# EAGLE board mainboard (EAGLE 6.3)
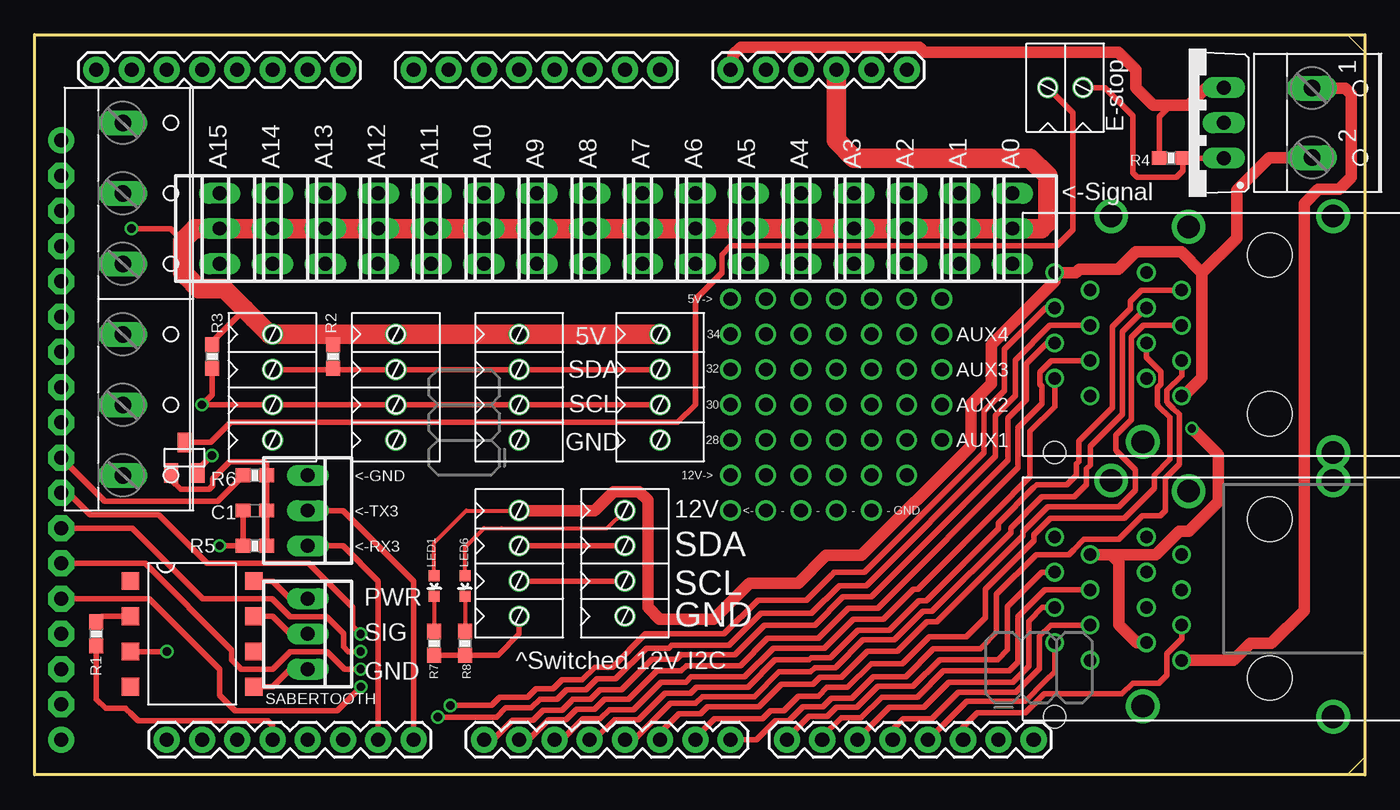
[diagram p0: board, top side]
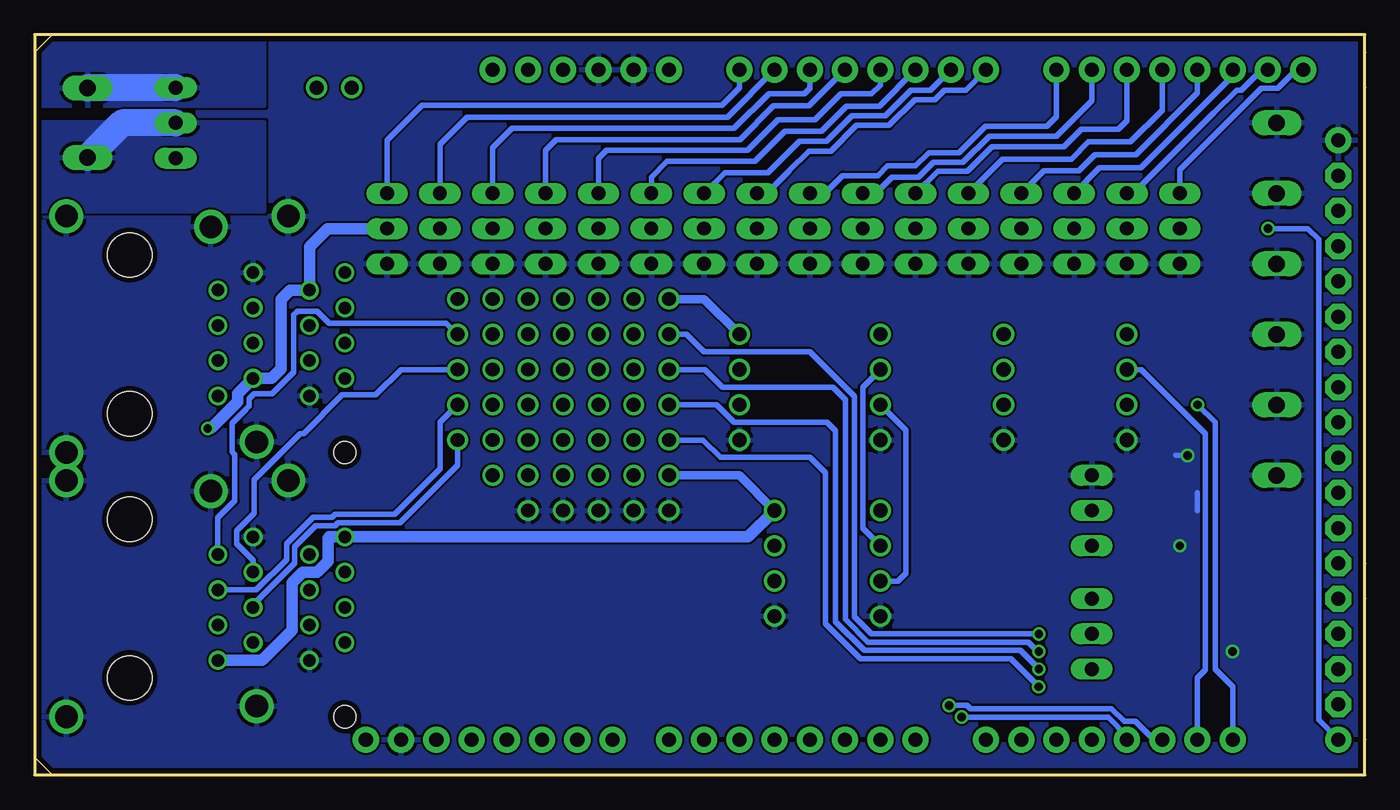
[diagram p1: board, bottom side, seen from below]

Size 95.89 x 53.34 mm. Coordinates in mm from the lower left corner, seen from the top.
Outline: 0,15.88 0,12.7 0,1.27 0,0 94.62,0 95.89,1.27 95.89,52.07 94.62,53.34 0,53.34 0,52.07 0,50.8 0,48.9 0,15.88
Copper layers (1*16): Top 0.0356mm / dielectric 1.5011mm / Bottom 0.0356mm
Design rules "LaenPCBOrder *": minimum track width 6mil, minimum drill 13mil, track to track 6mil, track to pad 6mil, pad to pad 6mil, via to via 6mil, smd to smd 6mil, copper to edge 15mil, drill to drill 6mil, minimum pad ring 7mil, minimum via ring 7mil, stop-mask expansion 4mil, vias tented up to drill 24mil, thermal gap 10mil

## Footprints (pad centres in the part's own frame; a part is rotated, then mirrored left to right if it is on the bottom)
SCREW_TERMINAL_4 = drill 1.016 pad 1.422: P$1 0,3.81; P$2 0,1.27; P$3 0,-1.27; P$4 0,-3.81
C0603 = smd 1.1 x 1: 1 -0.85,0; 2 0.85,0
LED-0603 = smd 0.8 x 0.8: A 0,-0.75; C 0,0.75
TO220BV = drill 1.016 long: D 0,-2.54; G -2.54,-2.54; S 2.54,-2.54
SOT23 = smd 1 x 1.4: 1 -0.95,-1.1; 2 0.95,-1.1; 3 0,1.1
0603-RES = smd 1.1 x 1: 1 -0.85,0; 2 0.85,0
22-23-2031 = drill 1 long: 1 -2.54,0; 2 0,0; 3 2.54,0
ARDUINO_MEGA_ISAAC = drill 1.016 pad 1.88: 0 63.5,50.8; 1 60.96,50.8; 2 58.42,50.8; 3 55.88,50.8; 3.3V 35.56,2.54; 4 53.34,50.8; 5 50.8,50.8; 5V@0 38.1,2.54; 5V@1 93.98,50.8; 6 48.26,50.8; 7 45.72,50.8; 8 41.656,50.8; 9 39.116,50.8; 10 36.576,50.8; 11 34.036,50.8; 12 31.496,50.8; 13 28.956,50.8; 14 68.58,50.8; 15 71.12,50.8; 16 73.66,50.8; 17 76.2,50.8; 18 78.74,50.8; 19 81.28,50.8; 20 83.82,50.8; 21 86.36,50.8; A0 50.8,2.54; A1 53.34,2.54; A2 55.88,2.54; A3 58.42,2.54; A4 60.96,2.54; A5 63.5,2.54; A6 66.04,2.54; A7 68.58,2.54; A8 73.66,2.54; A9 76.2,2.54; A10 78.74,2.54; A11 81.28,2.54; A12 83.82,2.54; A13 86.36,2.54; A14 88.9,2.54; A15 91.44,2.54; AREF 23.876,50.8; GND@0 40.64,2.54; GND@1 43.18,2.54; GND@2 93.98,7.62; GND@4 26.416,50.8; RESET 33.02,2.54; VIN 45.72,2.54 | drill 1.016 pad 1.88 octagon: 22 93.98,48.26; 24 93.98,45.72; 26 93.98,43.18; 28 93.98,40.64; 30 93.98,38.1; 32 93.98,35.56; 34 93.98,33.02; 36 93.98,30.48; 38 93.98,27.94; 40 93.98,25.4; 42 93.98,22.86; 44 93.98,20.32; 46 93.98,17.78; 48 93.98,15.24; 50 93.98,12.7; 52 93.98,10.16
SCREW_TERMINAL_2 = drill 1.016 pad 1.422: P$1 0,1.27; P$2 0,-1.27
RJ45-DUAL-10118096 = drill 0.9: 9 4.445,-2.032; 10 3.175,-4.572; 11 1.905,-2.032; 12 0.635,-4.572; 13 -0.635,-2.032; 14 -1.905,-4.572; 15 -3.175,-2.032; 16 -4.445,-4.572; P$1 4.445,4.572; P$2 3.175,2.032; P$3 1.905,4.572; P$4 0.635,2.032; P$5 -0.635,4.572; P$6 -1.905,2.032; P$7 -3.175,4.572; P$8 -4.445,2.032 | drill 1.625: SHIELD1 8.509,0.508; SHIELD2 7.747,-5.08; SHIELD3 8.509,-15.494; SHIELD4 -8.509,-15.494; SHIELD5 -7.747,-1.778 | hole 3.2: -5.715,-10.922; 5.715,-10.922 | hole 1.6: -8.509,4.572
8-SMD-GULLWING = smd 1.27 x 1.27: P$1 3.81,4.445; P$2 1.27,4.445; P$3 -1.27,4.445; P$4 -3.81,4.445; P$5 -3.81,-4.445; P$6 -1.27,-4.445; P$7 1.27,-4.445; P$8 3.81,-4.445
PLATED_HOLE = drill 1: P$1 0,0
W237-102 = drill 1.194 long: 1 -2.5,-1.27; 2 2.5,-1.27
W237-6P = drill 1.194 long: 1 -12.7,-0.635; 2 -7.62,-0.635; 3 -2.54,-0.635; 4 2.54,-0.635; 5 7.62,-0.635; 6 12.7,-0.635

## Placement (x,y rotation side)
5V_I2C1  SCREW_TERMINAL_4  [SCREW_TERMINAL_4]  17.15,27.94 0 top
5V_I2C2  SCREW_TERMINAL_4  [SCREW_TERMINAL_4]  26.04,27.94 0 top
5V_I2C3  SCREW_TERMINAL_4  [SCREW_TERMINAL_4]  34.93,27.94 0 top
5V_I2C4  SCREW_TERMINAL_4  [SCREW_TERMINAL_4]  45.09,27.94 0 top
12V_I2C  SCREW_TERMINAL_4  [SCREW_TERMINAL_4]  42.55,15.24 0 top
C1  4.7uF  [C0603]  15.88,19.05 180 top
I2C_LEDS  SCREW_TERMINAL_4  [SCREW_TERMINAL_4]  34.93,15.24 0 top
LED1  [LED-0603]  28.8,13.61 180 top
LED6  [LED-0603]  31.01,13.61 180 top
Q1  IRF9530  [TO220BV]  83.19,46.99 90 top
Q2  NFET  [SOT23]  10.8,22.86 0 top
R1  2k  [0603-RES]  4.45,10.16 90 top
R2  2k  [0603-RES]  21.51,30.15 90 top
R3  2k  [0603-RES]  12.8,30.15 90 top
R4  2k  [0603-RES]  81.92,44.45 180 top
R5  100k  [0603-RES]  15.88,16.51 0 top
R6  10k  [0603-RES]  15.88,21.59 180 top
R7  2k  [0603-RES]  28.8,9.47 270 top
R8  2k  [0603-RES]  31.01,9.47 270 top
SERIAL_3  22-23-2031  [22-23-2031]  19.69,19.05 270 top
U1  ARDUINO-MEGA-ISAACFULL  [ARDUINO_MEGA_ISAAC]  95.89,53.34 180 top
U$1  E-stop  [SCREW_TERMINAL_2]  74.3,49.53 90 top
U$2  RJ45-DUAL-STACKED  [RJ45-DUAL-10118096]  78.11,12.7 90 top
U$3  SFH6701-SMD8  [8-SMD-GULLWING]  11.35,10.16 90 top
U$4  RJ45-DUAL-STACKED  [RJ45-DUAL-10118096]  78.11,31.75 90 top
U$5  SINGLE_TERMINAL  [PLATED_HOLE]  50.17,24.13 0 top
U$6  SINGLE_TERMINAL  [PLATED_HOLE]  50.17,26.67 0 top
U$7  SINGLE_TERMINAL  [PLATED_HOLE]  50.17,29.21 0 top
U$8  SINGLE_TERMINAL  [PLATED_HOLE]  50.17,31.75 0 top
U$9  SINGLE_TERMINAL  [PLATED_HOLE]  65.41,24.13 0 top
U$10  SINGLE_TERMINAL  [PLATED_HOLE]  65.41,26.67 0 top
U$11  SINGLE_TERMINAL  [PLATED_HOLE]  65.41,29.21 0 top
U$12  SINGLE_TERMINAL  [PLATED_HOLE]  65.41,31.75 0 top
U$13  SINGLE_TERMINAL  [PLATED_HOLE]  52.71,31.75 0 top
U$14  SINGLE_TERMINAL  [PLATED_HOLE]  52.71,29.21 0 top
U$15  SINGLE_TERMINAL  [PLATED_HOLE]  52.71,26.67 0 top
U$16  SINGLE_TERMINAL  [PLATED_HOLE]  52.71,24.13 0 top
U$17  SINGLE_TERMINAL  [PLATED_HOLE]  55.25,31.75 0 top
U$18  SINGLE_TERMINAL  [PLATED_HOLE]  55.25,29.21 0 top
U$19  SINGLE_TERMINAL  [PLATED_HOLE]  55.25,26.67 0 top
U$20  SINGLE_TERMINAL  [PLATED_HOLE]  57.79,31.75 0 top
U$21  SINGLE_TERMINAL  [PLATED_HOLE]  55.25,24.13 0 top
U$22  SINGLE_TERMINAL  [PLATED_HOLE]  57.79,29.21 0 top
U$23  SINGLE_TERMINAL  [PLATED_HOLE]  57.79,26.67 0 top
U$24  SINGLE_TERMINAL  [PLATED_HOLE]  57.79,24.13 0 top
U$25  SINGLE_TERMINAL  [PLATED_HOLE]  60.33,31.75 0 top
U$26  SINGLE_TERMINAL  [PLATED_HOLE]  62.87,31.75 0 top
U$27  SINGLE_TERMINAL  [PLATED_HOLE]  60.33,29.21 0 top
U$28  SINGLE_TERMINAL  [PLATED_HOLE]  62.87,29.21 0 top
U$29  SINGLE_TERMINAL  [PLATED_HOLE]  60.33,26.67 0 top
U$30  SINGLE_TERMINAL  [PLATED_HOLE]  60.33,24.13 0 top
U$31  SINGLE_TERMINAL  [PLATED_HOLE]  62.87,26.67 0 top
U$32  SINGLE_TERMINAL  [PLATED_HOLE]  62.87,24.13 0 top
U$33  SINGLE_TERMINAL  [PLATED_HOLE]  52.71,21.59 0 top
U$34  SINGLE_TERMINAL  [PLATED_HOLE]  50.17,21.59 0 top
U$35  SINGLE_TERMINAL  [PLATED_HOLE]  57.79,21.59 0 top
U$36  SINGLE_TERMINAL  [PLATED_HOLE]  55.25,21.59 0 top
U$37  SINGLE_TERMINAL  [PLATED_HOLE]  60.33,21.59 0 top
U$38  SINGLE_TERMINAL  [PLATED_HOLE]  50.17,34.29 0 top
U$39  SINGLE_TERMINAL  [PLATED_HOLE]  52.71,34.29 0 top
U$40  SINGLE_TERMINAL  [PLATED_HOLE]  57.79,34.29 0 top
U$41  SINGLE_TERMINAL  [PLATED_HOLE]  55.25,34.29 0 top
U$42  SINGLE_TERMINAL  [PLATED_HOLE]  60.33,34.29 0 top
U$43  SINGLE_TERMINAL  [PLATED_HOLE]  62.87,34.29 0 top
U$44  SINGLE_TERMINAL  [PLATED_HOLE]  65.41,34.29 0 top
U$45  SINGLE_TERMINAL  [PLATED_HOLE]  50.17,19.05 0 top
U$46  SINGLE_TERMINAL  [PLATED_HOLE]  62.87,21.59 0 top
U$47  SINGLE_TERMINAL  [PLATED_HOLE]  52.71,19.05 0 top
U$48  SINGLE_TERMINAL  [PLATED_HOLE]  55.25,19.05 0 top
U$49  SINGLE_TERMINAL  [PLATED_HOLE]  57.79,19.05 0 top
U$50  SINGLE_TERMINAL  [PLATED_HOLE]  60.33,19.05 0 top
X1  22-23-2031  [22-23-2031]  70.49,39.37 90 top
X2  22-23-2031  [22-23-2031]  66.68,39.37 90 top
X3  22-23-2031  [22-23-2031]  62.87,39.37 90 top
X4  22-23-2031  [22-23-2031]  59.06,39.37 90 top
X5  22-23-2031  [22-23-2031]  55.25,39.37 90 top
X6  22-23-2031  [22-23-2031]  51.44,39.37 90 top
X7  22-23-2031  [22-23-2031]  47.63,39.37 90 top
X8  22-23-2031  [22-23-2031]  43.82,39.37 90 top
X9  22-23-2031  [22-23-2031]  40.01,39.37 90 top
X10  22-23-2031  [22-23-2031]  36.2,39.37 90 top
X11  22-23-2031  [22-23-2031]  32.39,39.37 90 top
X12  22-23-2031  [22-23-2031]  28.58,39.37 90 top
X13  22-23-2031  [22-23-2031]  24.77,39.37 90 top
X14  22-23-2031  [22-23-2031]  20.96,39.37 90 top
X15  22-23-2031  [22-23-2031]  17.15,39.37 90 top
X16  22-23-2031  [22-23-2031]  13.34,39.37 90 top
X17  22-23-2031  [22-23-2031]  19.69,10.16 270 top
X18  [W237-102]  93.35,46.99 270 top
X19  [W237-6P]  6.99,34.29 270 top

## Library data of the parts
5V_I2C1-5V_I2C4 12V_I2C I2C_LEDS U$1-U$50 = isaac1
C1 = rcl
LED1 LED6 = SparkFun-LED
Q1 = Adams Chips
Q2 = SparkFun-DiscreteSemi; PROD_ID: TRANS-08345
R1-R8 = SparkFun-Resistors
SERIAL_3 X1-X17 = con-molex; MF: MOLEX; MPN: 22-23-2031; OC_FARNELL: 1462950; OC_NEWARK: 30C0862
U1 = SparkFun-Boards - Isaac_Copy
X18 = con-wago-500; MPN: 237-102; OC_FARNELL: unknown; OC_NEWARK: 70K9898
X19 = con-wago-508; OC_FARNELL: unknown; OC_NEWARK: unknown

## Nets
2: U1.2 U$4.P$7
3: U1.3 U$4.10
4: U1.4 U$4.11
5: U1.5 U$4.12
6: U1.6 U$4.13
7: U1.7 U$4.14
8: U1.8 U$2.P$3
9: U1.9 U$2.P$4
10: U1.10 U$2.P$5
11: U1.11 U$2.P$6
12: U1.12 U$2.P$7
13: U1.13 U$2.14
28: U1.28 U$5.P$1
30: U1.30 U$6.P$1
32: U1.32 U$7.P$1
34: U1.34 U$8.P$1
+5V: 5V_I2C1.P$1 5V_I2C2.P$1 5V_I2C3.P$1 5V_I2C4.P$1 R2.2 R3.2 U1.5V@0 U1.5V@1 U$2.15 U$2.P$2 U$4.15 U$4.P$2 U$38.P$1 X1.2 X2.2 X3.2 X4.2 X5.2 X6.2 X7.2 X8.2 X9.2 X10.2 X11.2 X12.2 X13.2 X14.2 X15.2 X16.2
+12: 12V_I2C.P$1 LED6.A Q1.S R4.2 U1.VIN U$2.16 U$2.P$1 U$34.P$1 X18.1
A0: U1.A0 X1.3
A1: U1.A1 X2.3
A2: U1.A2 X3.3
A3: U1.A3 X4.3
A4: U1.A4 X5.3
A5: U1.A5 X6.3
A6: U1.A6 X7.3
A7: U1.A7 X8.3
A8: U1.A8 X9.3
A9: U1.A9 X10.3
A10: U1.A10 X11.3
A11: U1.A11 X12.3
A12: U1.A12 X13.3
A13: U1.A13 X14.3
A14: U1.A14 X15.3
A15: U1.A15 X16.3
AUX1: U$2.13 U$9.P$1
AUX2: U$2.12 U$10.P$1
AUX3: U$2.11 U$11.P$1
AUX4: U$2.10 U$12.P$1
GND: 5V_I2C1.P$4 5V_I2C2.P$4 5V_I2C3.P$4 5V_I2C4.P$4 12V_I2C.P$4 C1.2 I2C_LEDS.P$4 Q2.2 R5.1 R7.2 R8.2 SERIAL_3.1 U1.GND@0 U1.GND@1 U1.GND@2 U1.GND@4 U$2.9 U$2.P$8 U$2.SHIELD1 U$2.SHIELD2 U$2.SHIELD3 U$2.SHIELD4 U$2.SHIELD5 U$3.P$3 U$4.9 U$4.P$8 U$4.SHIELD1 U$4.SHIELD2 U$4.SHIELD3 U$4.SHIELD4 U$4.SHIELD5 U$45.P$1 U$47.P$1 U$48.P$1 U$49.P$1 U$50.P$1 X1.1 X2.1 X3.1 X4.1 X5.1 X6.1 X7.1 X8.1 X9.1 X10.1 X11.1 X12.1 X13.1 X14.1 X15.1 X16.1 X19.1 X19.2 X19.3 X19.4 X19.5 X19.6
N: Q1.G R4.1 U$1.P$2
N1: C1.1 Q2.1 R5.2 R6.1
N$1: U$3.P$8 X17.1
N$2: R1.2 U$3.P$2
N$3: U$3.P$7 X17.2
N$4: U$3.P$5 X17.3
N$5: SERIAL_3.3 U1.15
N$6: SERIAL_3.2 U1.14
N$7: Q2.3 U$1.P$1
N$8: LED1.C R7.1
N$9: LED6.C R8.1
PERIPHERAL_POWER: R6.2 U1.36
PERIPHERALS: I2C_LEDS.P$1 LED1.A Q1.D U$4.16 U$4.P$1 X18.2
RX0: U1.0 U$4.P$5
RX1: U1.19 U$4.P$3
RX2: U1.17
SCL: 5V_I2C1.P$3 5V_I2C2.P$3 5V_I2C3.P$3 5V_I2C4.P$3 12V_I2C.P$3 I2C_LEDS.P$3 R3.1 U1.21
SDA: 5V_I2C1.P$2 5V_I2C2.P$2 5V_I2C3.P$2 5V_I2C4.P$2 12V_I2C.P$2 I2C_LEDS.P$2 R2.1 U1.20
TX0: U1.1 U$4.P$6
TX1: R1.1 U1.18 U$4.P$4
TX2: U1.16

## Tracks (layer width: path | path; a pad name or v marks a point on that pad's centre or on a via)
2
  Top 0.406: U1.2 38.02,2.54 39.52,4.04 40.77,4.04 41.43,4.7 43.16,4.7 45.14,6.68 46.94,6.68 47.32,7.06 51.18,7.06 53.26,9.14 56.95,9.14 59.03,11.23 61.19,11.23 63.35,13.39 63.68,13.39 69.27,18.97 71.76,21.49 71.76,24.77 73.53,26.52 U$4.P$7
3
  Top 0.406: U1.3 40.34,2.54 41.78,3.99 43.54,3.99 45.44,5.89 47.27,5.89 47.7,6.33 51.41,6.33 53.37,8.28 55.83,8.28 56.01,8.46 57.38,8.46 59.36,10.44 61.62,10.44 63.73,12.55 64.29,12.55 69.47,17.73 69.47,18.14 72.01,20.68 72.24,20.9 74.07,20.9 74.42,20.9 75.11,21.59 75.11,22.28 75.11,22.43 75.26,22.58 75.26,24.03 76.96,25.73 77.7,26.47 77.7,32.31 78.99,33.6 78.99,34.14 79.78,34.92 U$4.10
4
  Top 0.406: U1.4 43.21,2.54 45.82,5.16 47.65,5.16 48.13,5.64 51.89,5.64 53.67,7.42 55.93,7.42 56.24,7.72 57.71,7.72 59.72,9.73 61.98,9.73 64.03,11.79 64.69,11.79 70.36,17.45 70.36,17.78 72.62,20.04 74.42,20.04 74.96,20.04 75.82,20.9 75.82,21.87 75.82,22.05 76.1,22.33 76.1,23.67 77.72,25.3 78.41,25.98 78.41,31.93 U$4.11
5
  Top 0.406: U1.5 45.09,3.02 46.46,4.39 47.98,4.39 48.49,4.9 52.2,4.9 53.82,6.53 56.11,6.53 56.62,7.04 58.14,7.04 60.02,8.91 62.18,8.91 64.31,11.05 65.05,11.05 71.22,17.22 71.22,17.53 73.03,19.33 74.73,19.33 78.16,19.33 79.35,20.52 79.35,22 77.99,23.36 | U$4.12 79.93,32.38 79.07,31.52 79.07,25.6 78.41,24.94 77.93,24.46 77.93,23.42 77.99,23.36 | 77.99,23.36 78.41,22.94
6
  Top 0.406: U1.6 47.63,2.69 49,4.06 52.48,4.06 53.04,4.62 54,4.62 55.04,5.66 56.49,5.66 57.13,6.3 58.6,6.3 60.33,8.03 62.56,8.03 64.49,9.96 67.16,9.96 68.53,11.33 68.53,13.36 72.03,16.87 72.03,17.32 73.2,18.49 75.03,18.49 78.54,18.49 80.7,20.65 80.7,21.16 80.7,21.59 81.84,22.73 81.84,25.76 81.05,26.54 81,26.59 80.92,26.67 80.92,27.84 80.92,27.89 81.18,28.14 81.18,29.06 80.14,30.1 U$4.13
7
  Top 0.406: U1.7 52.05,2.54 53.42,3.91 54.38,3.91 55.32,4.85 55.4,4.93 56.82,4.93 57.43,5.54 58.93,5.54 60.48,7.09 62.79,7.09 64.8,9.09 68.17,9.09 69.34,10.26 69.34,13.01 72.21,15.88 74.27,15.88 74.52,15.88 74.55,15.88 74.91,16.23 75.64,16.97 78.16,16.97 79.86,18.67 81.15,18.67 81.51,19.02 81.51,21.39 82.5,22.38 82.5,25.98 82.09,26.39 81.69,26.8 81.61,26.87 81.61,27.71 82.68,28.78 U$4.14
8
  Top 0.406: U1.8 54.23,2.64 55.83,4.24 57.15,4.24 57.68,4.78 57.79,4.88 59.28,4.88 60.78,6.38 63.32,6.38 65.25,8.31 69.42,8.31 70.13,9.02 70.13,12.12 72.62,14.61 U$2.P$3
9
  Top 0.406: U1.9 56.77,2.74 58.14,4.12 59.56,4.12 61.06,5.61 63.63,5.61 65.51,7.49 70.26,7.49 70.89,8.13 70.89,11.4 72.82,13.34 U$2.P$4
10
  Top 0.406: U1.10 59.31,2.56 61.62,4.88 64.11,4.88 65.91,6.68 70.51,6.68 71.65,7.82 71.65,11.07 72.64,12.06 U$2.P$5
11
  Top 0.406: U1.11 61.85,3.25 62.64,4.04 64.67,4.04 66.57,5.94 70.74,5.94 72.44,7.64 72.44,9.98 73.25,10.79 U$2.P$6
12
  Top 0.406: U1.12 64.44,2.54 67.21,5.31 71.4,5.31 72.82,6.73 73.53,7.44 U$2.P$7
13
  Top 0.406: U1.13 66.93,3.43 67.97,4.47 71.43,4.47 72.8,5.84 78.38,5.84 79.15,6.6 80.7,6.6 81.03,6.6 81.61,7.19 81.61,8.74 82.68,9.8 U$2.14
28  (via drill 0.6)
  Top 0.406: U1.28 8.26,12.7 13.34,7.62 13.34,5.74 14.45,4.62 21.79,4.62 v23.52,6.35
  Bottom 0.406: v23.52,6.35 23.52,6.38 25.5,8.36 36.35,8.36 38.89,10.9 38.89,21.77 40.01,22.89 46.46,22.89 47.7,24.13 U$5.P$1
30  (via drill 0.6)
  Top 0.406: U1.30 7.95,15.24 14.2,8.99 14.2,8.31 14.88,7.62 17.15,7.62 18.42,8.89 21.08,8.89 22.35,7.62 v23.5,7.62
  Bottom 0.406: v23.5,7.62 23.5,7.64 24.82,8.97 36.07,8.97 38.15,11.05 38.15,24.79 38.76,25.4 45.47,25.4 46.74,26.67 U$6.P$1
32  (via drill 0.6)
  Top 0.406: U1.32 7.04,17.78 12.12,12.7 17.12,12.7 18.42,11.4 21.03,11.4 22.28,10.16 22.28,9.22 22.61,8.89 v23.5,8.89
  Bottom 0.406: v23.5,8.89 23.57,8.89 24.26,9.58 35.81,9.58 37.44,11.2 37.44,27.05 38.33,27.94 46.3,27.94 47.57,29.21 U$7.P$1
34  (via drill 0.6)
  Top 0.406: U1.34 2.41,20.32 3.99,18.75 8.94,18.75 12.45,15.24 19.76,15.24 22.94,12.06 22.94,10.72 v23.5,10.16
  Bottom 0.406: v23.5,10.16 35.56,10.16 36.81,11.4 36.81,27.28 40.01,30.48 47.63,30.48 48.9,31.75 U$8.P$1
+5V  (via drill 0.6)
  Top 0.406: v6.99,39.37 9.8,39.37 10.67,38.51 | R2.2 21.51,31.04 22.23,31.75 | R3.2 12.8,31.22 15.14,33.55
  Top 0.813: U$2.15 79.45,9.53 78.16,10.82 78.16,15.34 77.62,15.88 | 77.62,15.88 U$2.P$2 | 77.62,15.88 80.82,15.88 82.5,17.55 83.19,17.55 85.32,19.68 85.32,23.06 v83.41,24.97
  Top 1.422: U1.5V@0 57.79,45.72 59.06,44.45 71.76,44.45 73.03,43.18 73.03,40.64 73.03,39.83 72.57,39.37 X1.2 X2.2 X3.2 X4.2 X5.2 X6.2 X7.2 X8.2 X9.2 X10.2 X11.2 X12.2 X13.2 X14.2 X15.2 X16.2 11.53,39.37 10.67,38.51 10.67,36.17 10.92,35.92 10.95,35.92 11.84,35.03 13.67,35.03 15.14,33.55 15.77,32.92 16.94,31.75 5V_I2C1.P$1 22.23,31.75 5V_I2C2.P$1 5V_I2C3.P$1 5V_I2C4.P$1
  Bottom 0.406: v6.99,39.37 4.12,39.37 3.33,38.58 3.33,4.14 3.33,3.96 U1.5V@1
  Bottom 0.61: U$38.P$1 47.63,34.29 5V_I2C4.P$1
  Bottom 0.813: X1.2 74.78,39.37 76.07,38.08 U$4.P$2 77.47,34.92 78.11,34.29 78.11,29.26 78.79,28.57 U$4.15 81.26,27.46 81.26,26.87 83.16,24.97 v83.41,24.97
+12
  Top 0.305: 12V_I2C.P$1 41.28,17.78 33.66,17.78 32.39,17.78 31.01,16.41 LED6.A
  Top 0.406: R4.2 81.07,47.41 81.92,48.26
  Top 0.813: Q1.S 84.46,49.53 83.19,48.26 81.92,48.26 80.65,48.26 79.38,49.53 79.38,50.8 78.11,52.07 73.3,52.07 64.14,52.07 63.78,52.43 52.1,52.43 50.9,52.43 50.36,51.88 50.36,50.99 U1.VIN | U$2.16 83.82,8.26 86.41,8.26 87.63,9.47 89.15,9.47 91.52,11.84 91.52,32.46 91.52,40.62 91.52,41.17 92.53,42.19 94.06,42.19 94.92,43.05 94.92,44.02 94.92,49.05 94.49,49.48 92.09,49.48 X18.1
  Bottom 0.61: U$34.P$1 45.09,21.59 12V_I2C.P$1
  Bottom 0.813: U$2.16 79.5,8.26 77.34,10.41 77.34,13.84 77.27,13.92 76.58,14.61 75.51,14.61 74.73,15.39 74.73,17.07 74.65,17.14 U$2.P$1 44.45,17.14 12V_I2C.P$1
  Bottom 1.93: Q1.S 92.04,49.53 X18.1
  pour Bottom: 95.89,48.26 79.38,48.26 79.38,53.34 95.89,53.34
A0
  Bottom 0.406: X1.3 70.49,45.72 67.95,48.26 46.36,48.26 45.09,49.53 U1.A0
A1
  Bottom 0.406: X2.3 66.68,45.44 64.72,47.4 45.95,47.4 U1.A1
A2
  Bottom 0.406: X3.3 62.87,45.19 61.47,46.58 45.47,46.58 42.95,49.1 40.39,49.1 40.01,49.48 U1.A2
A3
  Bottom 0.406: X4.3 59.06,45.01 58.29,45.77 45.06,45.77 42.62,48.21 40.06,48.21 U1.A3
A4
  Bottom 0.406: X5.3 55.25,44.42 54.66,45.01 44.5,45.01 42.29,47.22 39.62,47.22 37.77,49.07 35.56,49.07 34.93,49.71 U1.A4
A5
  Bottom 0.406: X6.3 51.44,43.08 50.29,44.22 43.97,44.22 41.81,46.38 39.17,46.38 37.36,48.18 35,48.18 U1.A5
A6
  Bottom 0.406: X7.3 46.13,43.41 43.03,43.41 41.96,44.48 41.95,44.48 40.77,45.66 38.8,45.66 36.96,47.5 34.54,47.5 32.7,49.34 31.31,49.34 U1.A6
A7
  Bottom 0.406: X8.3 43.1,41.91 41.5,43.51 41.5,43.52 40.07,44.96 38.48,44.96 36.64,46.8 34.29,46.8 32.45,48.64 30.99,48.64 30.29,49.34 28.77,49.34 U1.A7
A8
  Bottom 0.406: X9.3 38.93,41.91 37.66,43.18 35.12,43.18 34.42,43.88 32.39,43.88 31.43,44.83 29.27,44.83 27.37,46.74 22.92,46.74 22.23,47.43 U1.A8
A9
  Bottom 0.406: X10.3 35.24,41.91 34.23,42.93 34.1,43.05 32.2,43.05 31.12,44.13 28.96,44.13 27.05,46.04 22.23,46.04 19.69,48.58 U1.A9
A10
  Bottom 0.406: U1.A10 17.15,47.14 17.76,46.53 20.42,46.53 21.69,45.26 26.9,45.26 28.65,43.51 30.79,43.51 X11.3
A11
  Bottom 0.406: U1.A11 14.61,47.9 16.89,45.62 19.91,45.62 21.16,44.37 26.11,44.37 X12.3
A12
  Bottom 0.406: U1.A12 12.07,49.15 16.51,44.7 19.46,44.7 20.63,43.54 23.14,43.54 X13.3
A13
  Bottom 0.406: X14.3 19.13,43.74 16.15,43.74 11.25,48.64 9.53,50.37 U1.A13
A14
  Bottom 0.406: X15.3 16.69,41.91 10.9,47.7 9.25,49.35 8.89,49.35 7.44,50.8 U1.A14
A15
  Bottom 0.406: X16.3 13.34,43.61 10.21,46.74 7.47,49.48 6.27,49.48 4.95,50.8 U1.A15
AUX1
  Bottom 0.406: U$2.13 80.14,12.27 77.14,15.27 77.14,16.43 75.77,17.8 75.62,17.96 74.22,17.96 74.02,18.16 73.99,18.19 69.55,18.19 65.41,22.33 U$9.P$1
AUX2
  Bottom 0.406: U$2.12 79.91,13.34 77.72,15.52 77.72,16.66 75.82,18.57 74.45,18.57 74.22,18.8 69.93,18.8 66.68,22.05 66.68,25.4 U$10.P$1
AUX3
  Bottom 0.406: U$2.11 80.14,14.88 80.14,15.47 81.33,16.66 81.33,17.6 80.06,18.87 80.06,21.29 76.76,24.59 76.51,24.59 73.71,27.38 71.3,27.38 69.47,29.21 U$11.P$1 66.68,29.21
AUX4
  Bottom 0.406: U$2.10 82.68,17.88 82.68,18.52 81.56,19.63 81.46,19.74 81.46,23.09 81.56,23.19 81.66,23.29 81.66,25.35 80.65,26.36 80.52,26.49 80.44,26.57 80.44,27.1 80.06,27.48 78.77,27.48 77.22,29.03 77.22,33.15 77.01,33.35 76.94,33.43 75.54,33.43 74.68,32.56 66.22,32.56 U$12.P$1
GND  (via drill 0.6)
  Top 0.406: U$3.P$3 v9.53,8.89 | C1.2 R5.1 v13.34,16.51 | Q2.2 11.75,22.08 11.85,22.08 v12.78,23.01 | R7.2 R8.2 33.39,8.62 34.93,10.16 I2C_LEDS.P$4
  Bottom 0.406: 12.07,20.32 12.07,19.05 | v13.34,16.51 13.34,16.54 13.51,16.71 | 13.36,23.04 13.64,23.04 | v12.78,23.01 12.68,22.99 12.73,23.04
  pour Bottom (rank 2): -8.25,-1.27 97.16,-1.27 97.16,54.61 -8.25,54.61
N
  Top 0.406: Q1.G R4.1 82.77,43.52 82.3,43.05 79.5,43.05 79.17,43.38 79.17,47.5 77.14,49.53 U$1.P$2
N1
  Top 0.406: 9.68,21.59 Q2.1 9.85,21.25 10.52,20.57 12.57,20.57 12.83,20.83 12.83,21.34 13.79,22.3 14.07,22.58 16.59,22.58 16.74,22.43 16.74,21.6 R6.1 C1.1 R5.2
N$1
  Top 0.406: U$3.P$8 17.15,13.97 18.42,12.7 X17.1
N$2
  Top 0.406: U$3.P$2 4.87,11.43 R1.2
N$3
  Top 0.406: U$3.P$7 17.15,11.43 18.42,10.16 X17.2
N$4
  Top 0.406: U$3.P$5 17.15,6.35 18.42,7.62 X17.3
N$5
  Top 0.406: U1.15 24.77,13.97 22.23,16.51 SERIAL_3.3
N$6
  Top 0.406: U1.14 27.31,13.97 22.23,19.05 SERIAL_3.2
N$7
  Top 0.406: Q2.3 12.62,23.96 12.68,23.96 14.12,25.4 46.36,25.4 47.63,26.67 47.63,34.29 49.53,36.2 49.53,37.49 50.17,38.12 73.69,38.12 74.83,39.27 74.83,47.73 U$1.P$1
N$8
  Top 0.305: LED1.C R7.1
N$9
  Top 0.305: LED6.C R8.1
PERIPHERAL_POWER
  Top 0.406: R6.2 15.03,21.55 13.18,19.71 5.06,19.71 U1.36
PERIPHERALS
  Top 0.305: LED1.A 28.8,16.74 31.12,19.05 I2C_LEDS.P$1
  Top 0.813: U$4.16 82.83,27.3 84.15,28.63 84.15,36.2 | 84.15,36.2 82.65,37.69 79.38,37.69 78.13,36.45 75.31,36.45 75.06,36.2 U$4.P$1 73.53,35.59 68.96,31.01 68.96,28.19 67.49,26.72 67.49,23.7 59.61,15.82 57.05,15.82 55.04,13.82 51.51,13.82 48.92,11.23 45.06,11.23 44.2,12.09 44.2,19.79 43.56,20.42 41.73,20.42 40.36,19.05 I2C_LEDS.P$1 | X18.2 89.02,44.49 86.64,42.11 86.64,38.68 84.15,36.2
  Bottom 1.93: Q1.D 89.58,46.99 X18.2
  pour Bottom: 79.38,46.99 95.89,46.99 95.89,40.64 79.38,40.64
RX0
  Top 0.406: U1.0 33.05,2.54 34.44,3.94 35.92,3.94 36.65,4.67 38,4.67 38.68,5.36 38.76,5.44 40.06,5.44 40.77,6.15 42.32,6.15 44.5,8.33 46.28,8.33 46.61,8.66 50.47,8.66 52.6,10.79 56.24,10.79 58.27,12.83 60.33,12.83 70.16,22.66 70.16,25.7 71.48,27.03 71.48,29.62 72.97,31.11 U$4.P$5
RX1  (via drill 0.6)
  Top 0.406: v29.97,5 32.94,5 33.53,5.59 35.54,5.59 36.14,6.2 37.36,6.2 38.02,6.86 39.47,6.86 40.39,7.77 41.66,7.77 44.04,10.16 49.71,10.16 52.15,12.6 55.63,12.6 57.46,14.43 57.63,14.61 59.82,14.61 68.43,23.22 68.43,26.21 69.9,27.69 69.9,30.66 72.9,33.66 U$4.P$3
  Bottom 0.406: U1.19 15.22,2.54 16.46,3.79 16.54,3.86 17.35,3.86 18.26,4.78 28.45,4.78 28.68,5 v29.97,5
SCL  (via drill 0.6)
  Top 0.406: 5V_I2C4.P$3 5V_I2C3.P$3 5V_I2C2.P$3 5V_I2C1.P$3 13.34,26.67 v12.07,26.67 12.8,27.41 R3.1 | 12V_I2C.P$3 I2C_LEDS.P$3
  Bottom 0.406: 5V_I2C3.P$3 33.1,24.84 33.1,14.53 33.66,13.97 I2C_LEDS.P$3 | U1.21 9.53,6.35 10.8,7.62 10.8,25.4 v12.07,26.67
SDA
  Top 0.406: 5V_I2C4.P$2 5V_I2C3.P$2 5V_I2C2.P$2 21.6,29.21 R2.1 21.42,29.21 5V_I2C1.P$2 | 12V_I2C.P$2 I2C_LEDS.P$2
  Bottom 0.406: 5V_I2C3.P$2 36.2,27.94 36.2,17.78 I2C_LEDS.P$2 | U1.20 12.07,6.99 11.48,7.57 11.48,24.59 16.1,29.21 5V_I2C1.P$2
TX0
  Top 0.406: U1.1 35.61,2.54 37.03,3.96 38.3,3.96 39.07,4.72 40.36,4.72 41.07,5.44 42.8,5.44 44.86,7.49 46.61,7.49 46.99,7.87 50.88,7.87 52.83,9.83 56.49,9.83 58.67,12.01 60.78,12.01 70.89,22.12 70.89,25.02 72.62,26.75 72.62,28.02 72.54,28.09 72.47,28.17 72.47,29.03 73.28,29.84 U$4.P$6
TX1  (via drill 0.6)
  Top 0.406: R1.1 4.45,5.46 5.11,4.8 6.55,4.8 6.68,4.67 6.88,4.47 7.47,3.89 16.82,3.89 16.87,3.83 17.15,3.56 U1.18 | v29.06,4.17 33.3,4.17 33.96,4.83 35.79,4.83 36.42,5.46 37.67,5.46 38.35,6.15 39.75,6.15 40.54,6.93 41.89,6.93 44.09,9.14 45.72,9.14 45.92,9.35 50.06,9.35 52.35,11.63 56.01,11.63 58.01,13.64 59.94,13.64 69.27,22.96 69.27,25.88 70.69,27.3 70.69,29.9 73.18,32.38 U$4.P$4
  Bottom 0.406: U1.18 17.15,2.79 18.49,4.14 29.03,4.14 v29.06,4.17

## Text on the board
tPlace: A15 | A14 | A13 | A12 | A11 | A10 | A9 | A8 | A7 | A6 | A5 | A4 | A3 | A2 | A1 | A0 | <-Signal | 5V-> | 5V | 34 | AUX4 | 32 | AUX3 | 30 | AUX2 | 28 | AUX1 | GND | <-GND | 12V-> | <-TX3 | 12V | <- | - | - | - | - | GND | <-RX3 | SDA | SCL | PWR | GND | SIG | ^Switched 12V I2C | GND | SABERTOOTH
tNames: SDA | SCL